# Altium PCB 20230727_DAFABT-验证-FPC-73颗灯板.PcbDoc (part 2 of 2)
Units mm, origin at the board's own origin, x right, y up, seen from the top; angles counter-clockwise.
Board outline 277.23 x 135.59 mm, 2 copper layers (Top Layer, Bottom Layer); 80 components, 3 nets, 172 pads, 0 vias.
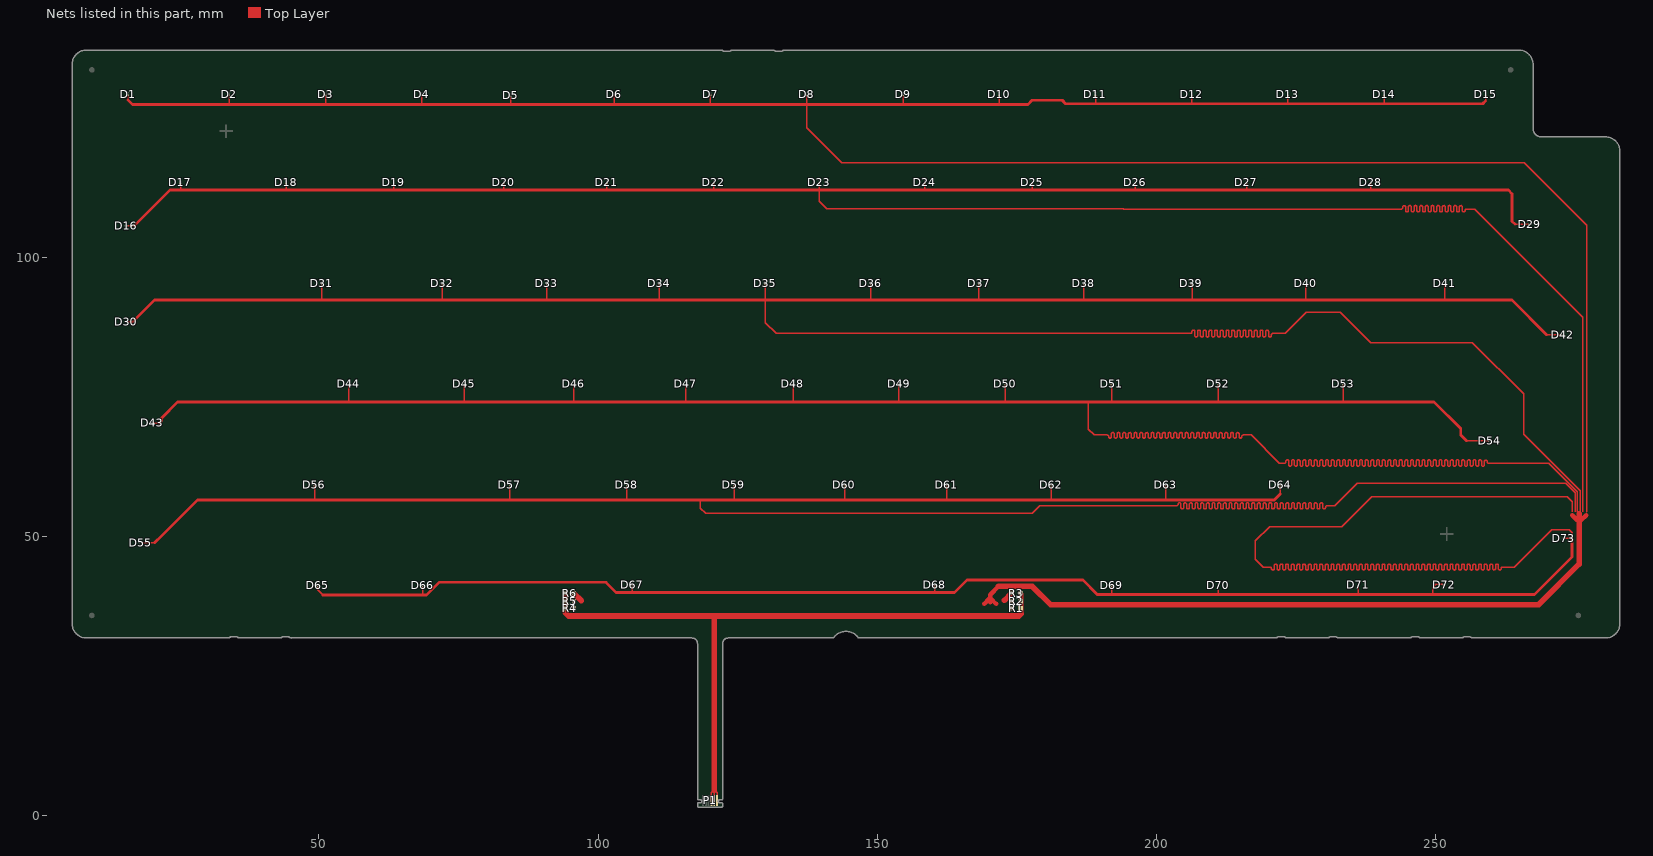
[diagram p2: the nets of this part, all layers, seen from the top]

## Nets (pads, with @x,y where several pads share a name; then routed paths per layer and width w, separated by ;. In a path a pad name is that pad's centre, name@x,y a point inside that pad or via, vN(x,y) a via of type N, cw(c..) or ccw(c..) an arc to the next point about the centre after c; other vN are vias at no path point) (continued)
Net30_1: D1.1 D2.1 D3.1 D4.1 D5.1 D6.1 D7.1 D8.1 D9.1 D10.1 D11.1 D12.1 D13.1 D14.1 D15.1 D16.1 D17.1 D18.1 D19.1 D20.1 D21.1 D22.1 D23.1 D24.1 D25.1 D26.1 D27.1 D28.1 D29.1 D30.1 D31.1 D32.1 D33.1 D34.1 D35.1 D36.1 D37.1 D38.1 D39.1 D40.1 D41.1 D42.1 D43.1 D44.1 D45.1 D46.1 D47.1 D48.1 D49.1 D50.1 D51.1 D52.1 D53.1 D54.1 D55.1 D56.1 D57.1 D58.1 D59.1 D60.1 D61.1 D62.1 D63.1 D64.1 D65.1 D66.1 D67.1 D68.1 D69.1 D70.1 D71.1 D72.1 D73.1 R1.2 R2.2 R3.2 R4.2 R5.2 R6.2 | length 2921.9
  Top Layer w0.254: 15.785,88.407 15.788,88.409 16.654,88.409 ; 15.785,105.631 15.793,105.639 16.993,105.639 ; 15.821,128.171 15.821,128.892 15.824,128.894 ; 18.387,48.842 20.597,48.842 ; 20.522,70.309 20.547,70.284 21.415,70.284 ; 25.219,113.091 25.222,113.088 25.222,112.002 ; 33.922,127.356 33.922,128.796 33.967,128.841 ; 44.143,113.091 44.145,113.089 44.145,112.002 ; 49.216,58.941 49.225,58.932 49.225,56.515 ; 49.765,40.891 49.765,40.43 50.698,39.497 ; 50.517,95.041 50.521,95.037 50.521,92.304 ; 51.204,128.885 51.206,128.882 51.206,127.356 ; 55.332,76.991 55.347,76.976 55.347,74.066 ; 63.389,113.091 63.398,113.082 63.398,112.002 ; 68.44,128.894 68.453,128.882 68.453,127.356 ; 68.58,39.497 68.58,40.868 68.603,40.891 ; 72.085,92.304 72.085,95.041 ; 76.073,74.066 76.073,76.991 ; 83.13,113.091 83.134,113.087 83.134,112.002 ; 84.15,56.515 84.15,58.93 84.161,58.941 ; 84.379,127.356 84.379,128.698 84.39,128.708 ; 90.813,95.041 90.83,95.024 90.83,92.304 ; 95.682,74.066 95.682,76.984 95.689,76.991 ; 101.6,112.002 101.6,113.085 101.606,113.091 ; 102.913,128.885 102.921,128.877 102.921,127.356 ; 105.143,58.941 105.156,58.928 105.156,56.515 ; 106.135,40.984 106.147,40.973 106.147,39.929 ; 110.971,95.041 110.998,95.014 110.998,92.304 ; 115.697,74.066 115.697,76.966 115.722,76.991 ; 118.339,56.515 118.339,55.016 119.253,54.102 177.775,54.102 179.146,55.474 187.452,55.474 203.632,55.474 ccw(c203.632,55.728) 203.886,55.728 203.886,55.753 cw(c204.14,55.753) 204.394,55.753 204.394,55.17 ccw(c204.648,55.17) 204.902,55.17 204.902,55.753 cw(c205.156,55.753) 205.41,55.753 205.41,55.17 ccw(c205.664,55.17) 205.918,55.17 205.918,55.753 cw(c206.172,55.753) 206.426,55.753 206.426,55.17 ccw(c206.68,55.17) 206.934,55.17 206.934,55.753 cw(c207.188,55.753) 207.442,55.753 207.442,55.17 ccw(c207.696,55.17) 207.95,55.17 207.95,55.753 cw(c208.204,55.753) 208.458,55.753 208.458,55.17 ccw(c208.712,55.17) 208.966,55.17 208.966,55.753 cw(c209.22,55.753) 209.474,55.753 209.474,55.17 ccw(c209.728,55.17) 209.982,55.17 209.982,55.753 cw(c210.236,55.753) 210.49,55.753 210.49,55.17 ccw(c210.744,55.17) 210.998,55.17 210.998,55.753 cw(c211.252,55.753) 211.506,55.753 211.506,55.17 ccw(c211.76,55.17) 212.014,55.17 212.014,55.753 cw(c212.268,55.753) 212.522,55.753 212.522,55.17 ccw(c212.776,55.17) 213.03,55.17 213.03,55.753 cw(c213.284,55.753) 213.538,55.753 213.538,55.17 ccw(c213.792,55.17) 214.046,55.17 214.046,55.753 cw(c214.3,55.753) 214.554,55.753 214.554,55.17 ccw(c214.808,55.17) 215.062,55.17 215.062,55.753 cw(c215.316,55.753) 215.57,55.753 215.57,55.17 ccw(c215.824,55.17) 216.078,55.17 216.078,55.753 cw(c216.332,55.753) 216.586,55.753 216.586,55.17 ccw(c216.84,55.17) 217.094,55.17 217.094,55.753 cw(c217.348,55.753) 217.602,55.753 217.602,55.17 ccw(c217.856,55.17) 218.11,55.17 218.11,55.753 cw(c218.364,55.753) 218.618,55.753 218.618,55.17 ccw(c218.872,55.17) 219.126,55.17 219.126,55.753 cw(c219.38,55.753) 219.634,55.753 219.634,55.17 ccw(c219.888,55.17) 220.142,55.17 220.142,55.753 cw(c220.396,55.753) 220.65,55.753 220.65,55.17 ccw(c220.904,55.17) 221.158,55.17 221.158,55.753 cw(c221.412,55.753) 221.666,55.753 221.666,55.17 ccw(c221.92,55.17) 222.174,55.17 222.174,55.753 cw(c222.428,55.753) 222.682,55.753 222.682,55.17 ccw(c222.936,55.17) 223.19,55.17 223.19,55.753 cw(c223.444,55.753) 223.698,55.753 223.698,55.17 ccw(c223.952,55.17) 224.206,55.17 224.206,55.753 cw(c224.46,55.753) 224.714,55.753 224.714,55.17 ccw(c224.968,55.17) 225.222,55.17 225.222,55.753 cw(c225.476,55.753) 225.73,55.753 225.73,55.17 ccw(c225.984,55.17) 226.238,55.17 226.238,55.753 cw(c226.492,55.753) 226.746,55.753 226.746,55.17 ccw(c227,55.17) 227.254,55.17 227.254,55.753 cw(c227.508,55.753) 227.762,55.753 227.762,55.17 ccw(c228.016,55.17) 228.27,55.17 228.27,55.753 cw(c228.524,55.753) 228.778,55.753 228.778,55.17 ccw(c229.032,55.17) 229.286,55.17 229.286,55.753 cw(c229.54,55.753) 229.794,55.753 229.794,55.17 ccw(c230.048,55.17) 230.302,55.17 230.302,55.22 cw(c230.556,55.22) 230.556,55.474 230.683,55.474 231.978,55.474 235.991,59.487 273.304,59.487 274.98,57.81 274.98,54.376 ; 120.142,127.356 120.142,128.877 120.15,128.885 ; 120.727,113.091 120.752,113.067 120.752,112.002 ; 124.331,58.941 124.358,58.914 124.358,56.515 ; 129.917,95.041 129.921,95.037 129.921,92.304 129.946,92.279 129.946,88.265 131.877,86.335 205.992,86.335 206.119,86.335 ccw(c206.119,86.589) 206.373,86.589 206.373,86.683 cw(c206.627,86.683) 206.881,86.683 206.881,85.945 ccw(c207.135,85.945) 207.389,85.945 207.389,86.683 cw(c207.643,86.683) 207.897,86.683 207.897,85.945 ccw(c208.151,85.945) 208.405,85.945 208.405,86.683 cw(c208.659,86.683) 208.913,86.683 208.913,85.945 ccw(c209.167,85.945) 209.421,85.945 209.421,86.683 cw(c209.675,86.683) 209.929,86.683 209.929,85.945 ccw(c210.183,85.945) 210.437,85.945 210.437,86.683 cw(c210.691,86.683) 210.945,86.683 210.945,85.945 ccw(c211.199,85.945) 211.453,85.945 211.453,86.683 cw(c211.707,86.683) 211.961,86.683 211.961,85.945 ccw(c212.215,85.945) 212.469,85.945 212.469,86.683 cw(c212.723,86.683) 212.977,86.683 212.977,85.945 ccw(c213.231,85.945) 213.485,85.945 213.485,86.683 cw(c213.739,86.683) 213.993,86.683 213.993,85.945 ccw(c214.247,85.945) 214.501,85.945 214.501,86.683 cw(c214.755,86.683) 215.009,86.683 215.009,85.945 ccw(c215.263,85.945) 215.517,85.945 215.517,86.683 cw(c215.771,86.683) 216.025,86.683 216.025,85.945 ccw(c216.279,85.945) 216.533,85.945 216.533,86.683 cw(c216.787,86.683) 217.041,86.683 217.041,85.945 ccw(c217.295,85.945) 217.549,85.945 217.549,86.683 cw(c217.803,86.683) 218.057,86.683 218.057,85.945 ccw(c218.311,85.945) 218.565,85.945 218.565,86.683 cw(c218.819,86.683) 219.073,86.683 219.073,85.945 ccw(c219.327,85.945) 219.581,85.945 219.581,86.683 cw(c219.835,86.683) 220.089,86.683 220.089,85.945 ccw(c220.343,85.945) 220.597,85.945 220.597,86.081 cw(c220.851,86.081) 220.851,86.335 223.037,86.335 223.726,87.023 226.873,90.17 232.893,90.17 238.354,84.709 256.616,84.709 265.811,75.514 265.811,68.275 275.895,58.191 275.895,54.392 ; 134.853,76.991 134.925,76.919 134.925,74.066 ; 137.386,128.885 137.389,128.883 137.389,127.356 137.389,123.19 143.688,116.891 265.887,116.891 277.038,105.74 277.038,54.381 277.032,54.376 ; 139.598,112.002 139.598,110.007 140.97,108.636 194.107,108.636 194.132,108.61 228.27,108.61 243.865,108.61 ccw(c243.865,108.864) 244.119,108.864 244.119,108.991 cw(c244.373,108.991) 244.627,108.991 244.627,108.354 ccw(c244.881,108.354) 245.135,108.354 245.135,109.003 cw(c245.389,109.003) 245.643,109.003 245.643,108.354 ccw(c245.897,108.354) 246.151,108.354 246.151,109.003 cw(c246.405,109.003) 246.659,109.003 246.659,108.354 ccw(c246.913,108.354) 247.167,108.354 247.167,109.003 cw(c247.421,109.003) 247.675,109.003 247.675,108.354 ccw(c247.929,108.354) 248.183,108.354 248.183,109.003 cw(c248.437,109.003) 248.691,109.003 248.691,108.354 ccw(c248.945,108.354) 249.199,108.354 249.199,109.003 cw(c249.453,109.003) 249.707,109.003 249.707,108.354 ccw(c249.961,108.354) 250.215,108.354 250.215,109.003 cw(c250.469,109.003) 250.723,109.003 250.723,108.354 ccw(c250.977,108.354) 251.231,108.354 251.231,109.003 cw(c251.485,109.003) 251.739,109.003 251.739,108.354 ccw(c251.993,108.354) 252.247,108.354 252.247,109.003 cw(c252.501,109.003) 252.755,109.003 252.755,108.354 ccw(c253.009,108.354) 253.263,108.354 253.263,109.003 cw(c253.517,109.003) 253.771,109.003 253.771,108.354 ccw(c254.025,108.354) 254.279,108.354 254.279,109.003 cw(c254.533,109.003) 254.787,109.003 254.787,108.354 ccw(c255.041,108.354) 255.295,108.354 255.295,108.356 cw(c255.549,108.356) 255.549,108.61 255.676,108.61 257.048,108.61 276.403,89.256 276.403,54.397 276.398,54.392 ; 139.624,112.002 139.624,113.088 139.628,113.091 ; 144.131,58.941 144.145,58.927 144.145,56.515 ; 148.819,92.304 148.819,95.017 148.843,95.041 ; 153.899,74.066 153.899,76.979 153.911,76.991 ; 154.623,128.894 154.635,128.882 154.635,127.356 ; 158.518,113.091 158.521,113.087 158.521,112.002 ; 160.336,40.984 160.35,40.971 160.35,39.929 ; 162.447,58.941 162.484,58.904 162.484,56.515 ; 168.224,92.304 168.224,95.024 168.241,95.041 ; 170.205,38.176 170.231,38.202 ; 171.856,127.356 171.856,128.892 171.859,128.894 ; 172.923,74.066 172.923,76.98 172.935,76.991 ; 177.775,112.002 177.775,113.088 177.778,113.091 ; 181.178,56.515 181.178,58.941 ; 187.02,92.304 187.02,95.028 187.033,95.041 ; 187.808,74.066 187.808,69.215 188.874,68.148 189.967,68.148 191.186,68.148 cw(c191.186,67.894) 191.44,67.894 191.44,67.852 ccw(c191.694,67.852) 191.948,67.852 191.948,68.349 cw(c192.202,68.349) 192.456,68.349 192.456,67.852 ccw(c192.71,67.852) 192.964,67.852 192.964,68.349 cw(c193.218,68.349) 193.472,68.349 193.472,67.852 ccw(c193.726,67.852) 193.98,67.852 193.98,68.349 cw(c194.234,68.349) 194.488,68.349 194.488,67.852 ccw(c194.742,67.852) 194.996,67.852 194.996,68.349 cw(c195.25,68.349) 195.504,68.349 195.504,67.852 ccw(c195.758,67.852) 196.012,67.852 196.012,68.349 cw(c196.266,68.349) 196.52,68.349 196.52,67.852 ccw(c196.774,67.852) 197.028,67.852 197.028,68.349 cw(c197.282,68.349) 197.536,68.349 197.536,67.852 ccw(c197.79,67.852) 198.044,67.852 198.044,68.349 cw(c198.298,68.349) 198.552,68.349 198.552,67.852 ccw(c198.806,67.852) 199.06,67.852 199.06,68.349 cw(c199.314,68.349) 199.568,68.349 199.568,67.852 ccw(c199.822,67.852) 200.076,67.852 200.076,68.349 cw(c200.33,68.349) 200.584,68.349 200.584,67.852 ccw(c200.838,67.852) 201.092,67.852 201.092,68.349 cw(c201.346,68.349) 201.6,68.349 201.6,67.852 ccw(c201.854,67.852) 202.108,67.852 202.108,68.349 cw(c202.362,68.349) 202.616,68.349 202.616,67.852 ccw(c202.87,67.852) 203.124,67.852 203.124,68.349 cw(c203.378,68.349) 203.632,68.349 203.632,67.852 ccw(c203.886,67.852) 204.14,67.852 204.14,68.349 cw(c204.394,68.349) 204.648,68.349 204.648,67.852 ccw(c204.902,67.852) 205.156,67.852 205.156,68.349 cw(c205.41,68.349) 205.664,68.349 205.664,67.852 ccw(c205.918,67.852) 206.172,67.852 206.172,68.349 cw(c206.426,68.349) 206.68,68.349 206.68,67.852 ccw(c206.934,67.852) 207.188,67.852 207.188,68.349 cw(c207.442,68.349) 207.696,68.349 207.696,67.852 ccw(c207.95,67.852) 208.204,67.852 208.204,68.349 cw(c208.458,68.349) 208.712,68.349 208.712,67.852 ccw(c208.966,67.852) 209.22,67.852 209.22,68.349 cw(c209.474,68.349) 209.728,68.349 209.728,67.852 ccw(c209.982,67.852) 210.236,67.852 210.236,68.349 cw(c210.49,68.349) 210.744,68.349 210.744,67.852 ccw(c210.998,67.852) 211.252,67.852 211.252,68.349 cw(c211.506,68.349) 211.76,68.349 211.76,67.852 ccw(c212.014,67.852) 212.268,67.852 212.268,68.349 cw(c212.522,68.349) 212.776,68.349 212.776,67.852 ccw(c213.03,67.852) 213.284,67.852 213.284,68.349 cw(c213.538,68.349) 213.792,68.349 213.792,67.852 ccw(c214.046,67.852) 214.3,67.852 214.3,68.349 cw(c214.554,68.349) 214.808,68.349 214.808,67.852 ccw(c215.062,67.852) 215.316,67.852 215.316,67.894 cw(c215.57,67.894) 215.57,68.148 215.697,68.148 216.967,68.148 222.047,63.068 222.809,63.068 222.936,63.068 ccw(c222.936,63.322) 223.19,63.322 223.19,63.438 cw(c223.444,63.438) 223.698,63.438 223.698,62.81 ccw(c223.952,62.81) 224.206,62.81 224.206,63.438 cw(c224.46,63.438) 224.714,63.438 224.714,62.81 ccw(c224.968,62.81) 225.222,62.81 225.222,63.438 cw(c225.476,63.438) 225.73,63.438 225.73,62.81 ccw(c225.984,62.81) 226.238,62.81 226.238,63.438 cw(c226.492,63.438) 226.746,63.438 226.746,62.81 ccw(c227,62.81) 227.254,62.81 227.254,63.438 cw(c227.508,63.438) 227.762,63.438 227.762,62.81 ccw(c228.016,62.81) 228.27,62.81 228.27,63.438 cw(c228.524,63.438) 228.778,63.438 228.778,62.81 ccw(c229.032,62.81) 229.286,62.81 229.286,63.438 cw(c229.54,63.438) 229.794,63.438 229.794,62.81 ccw(c230.048,62.81) 230.302,62.81 230.302,63.438 cw(c230.556,63.438) 230.81,63.438 230.81,62.81 ccw(c231.064,62.81) 231.318,62.81 231.318,63.438 cw(c231.572,63.438) 231.826,63.438 231.826,62.81 ccw(c232.08,62.81) 232.334,62.81 232.334,63.438 cw(c232.588,63.438) 232.842,63.438 232.842,62.81 ccw(c233.096,62.81) 233.35,62.81 233.35,63.438 cw(c233.604,63.438) 233.858,63.438 233.858,62.81 ccw(c234.112,62.81) 234.366,62.81 234.366,63.438 cw(c234.62,63.438) 234.874,63.438 234.874,62.81 ccw(c235.128,62.81) 235.382,62.81 235.382,63.438 cw(c235.636,63.438) 235.89,63.438 235.89,62.81 ccw(c236.144,62.81) 236.398,62.81 236.398,63.438 cw(c236.652,63.438) 236.906,63.438 236.906,62.81 ccw(c237.16,62.81) 237.414,62.81 237.414,63.438 cw(c237.668,63.438) 237.922,63.438 237.922,62.81 ccw(c238.176,62.81) 238.43,62.81 238.43,63.438 cw(c238.684,63.438) 238.938,63.438 238.938,62.81 ccw(c239.192,62.81) 239.446,62.81 239.446,63.438 cw(c239.7,63.438) 239.954,63.438 239.954,62.81 ccw(c240.208,62.81) 240.462,62.81 240.462,63.438 cw(c240.716,63.438) 240.97,63.438 240.97,62.81 ccw(c241.224,62.81) 241.478,62.81 241.478,63.438 cw(c241.732,63.438) 241.986,63.438 241.986,62.81 ccw(c242.24,62.81) 242.494,62.81 242.494,63.438 cw(c242.748,63.438) 243.002,63.438 243.002,62.81 ccw(c243.256,62.81) 243.51,62.81 243.51,63.438 cw(c243.764,63.438) 244.018,63.438 244.018,62.81 ccw(c244.272,62.81) 244.526,62.81 244.526,63.438 cw(c244.78,63.438) 245.034,63.438 245.034,62.81 ccw(c245.288,62.81) 245.542,62.81 245.542,63.438 cw(c245.796,63.438) 246.05,63.438 246.05,62.81 ccw(c246.304,62.81) 246.558,62.81 246.558,63.438 cw(c246.812,63.438) 247.066,63.438 247.066,62.81 ccw(c247.32,62.81) 247.574,62.81 247.574,63.438 cw(c247.828,63.438) 248.082,63.438 248.082,62.81 ccw(c248.336,62.81) 248.59,62.81 248.59,63.438 cw(c248.844,63.438) 249.098,63.438 249.098,62.81 ccw(c249.352,62.81) 249.606,62.81 249.606,63.438 cw(c249.86,63.438) 250.114,63.438 250.114,62.81 ccw(c250.368,62.81) 250.622,62.81 250.622,63.438 cw(c250.876,63.438) 251.13,63.438 251.13,62.81 ccw(c251.384,62.81) 251.638,62.81 251.638,63.438 cw(c251.892,63.438) 252.146,63.438 252.146,62.81 ccw(c252.4,62.81) 252.654,62.81 252.654,63.438 cw(c252.908,63.438) 253.162,63.438 253.162,62.81 ccw(c253.416,62.81) 253.67,62.81 253.67,63.438 cw(c253.924,63.438) 254.178,63.438 254.178,62.81 ccw(c254.432,62.81) 254.686,62.81 254.686,63.438 cw(c254.94,63.438) 255.194,63.438 255.194,62.81 ccw(c255.448,62.81) 255.702,62.81 255.702,63.438 cw(c255.956,63.438) 256.21,63.438 256.21,62.81 ccw(c256.464,62.81) 256.718,62.81 256.718,63.438 cw(c256.972,63.438) 257.226,63.438 257.226,62.81 ccw(c257.48,62.81) 257.734,62.81 257.734,63.438 cw(c257.988,63.438) 258.242,63.438 258.242,62.81 ccw(c258.496,62.81) 258.75,62.81 258.75,63.39 cw(c259.004,63.39) 259.258,63.39 259.258,63.322 ccw(c259.512,63.322) 259.512,63.068 265.201,63.068 270.281,63.068 275.361,57.988 275.361,54.376 ; 189.096,128.894 189.103,128.887 189.103,127.457 ; 191.975,76.991 191.999,76.968 191.999,74.066 ; 192.036,40.891 192.049,40.878 192.049,39.599 ; 196.215,112.002 196.215,113.084 196.222,113.091 ; 201.651,58.941 201.676,58.916 201.676,56.515 ; 206.281,95.041 206.4,94.922 206.4,92.304 ; 206.332,128.894 206.35,128.877 206.35,127.457 ; 211.072,76.991 211.125,76.938 211.125,74.066 ; 211.074,39.599 211.074,40.413 211.088,40.428 ; 216.134,113.091 216.154,113.072 216.154,112.002 ; 222.18,57.575 D64.1@222.18,59.072 ; 223.569,128.894 223.571,128.892 223.571,127.457 ; 224.358,127.457 224.384,127.483 ; 226.797,92.304 226.797,95.041 ; 233.435,74.066 233.435,76.991 ; 236.168,40.984 236.169,40.983 236.169,39.599 ; 238.367,112.002 238.367,113.091 ; 240.805,128.885 240.817,128.873 240.817,127.483 ; 249.479,39.599 249.479,40.818 250.063,41.402 251.172,41.402 251.247,41.327 ; 251.637,92.304 251.637,95.041 ; 255.575,67.111 D54.1@259.52,67.111 ; 258.948,127.986 D15.1@258.948,129.008 ; 264.211,105.92 D29.1@266.72,105.92 ; 268.478,37.719 268.478,37.795 ; 269.917,86.09 D42.1@272.607,86.09 ; D73.1@273.156,49.652 274.298,49.652 274.447,49.503 274.447,50.673 273.914,51.206 270.789,51.206 264.084,44.501 262.141,44.501 262.014,44.501 ccw(c262.014,44.247) 261.76,44.247 261.76,44.219 cw(c261.506,44.219) 261.252,44.219 261.252,44.768 ccw(c260.998,44.768) 260.744,44.768 260.744,44.219 cw(c260.49,44.219) 260.236,44.219 260.236,44.768 ccw(c259.982,44.768) 259.728,44.768 259.728,44.219 cw(c259.474,44.219) 259.22,44.219 259.22,44.768 ccw(c258.966,44.768) 258.712,44.768 258.712,44.219 cw(c258.458,44.219) 258.204,44.219 258.204,44.768 ccw(c257.95,44.768) 257.696,44.768 257.696,44.219 cw(c257.442,44.219) 257.188,44.219 257.188,44.768 ccw(c256.934,44.768) 256.68,44.768 256.68,44.219 cw(c256.426,44.219) 256.172,44.219 256.172,44.768 ccw(c255.918,44.768) 255.664,44.768 255.664,44.219 cw(c255.41,44.219) 255.156,44.219 255.156,44.768 ccw(c254.902,44.768) 254.648,44.768 254.648,44.219 cw(c254.394,44.219) 254.14,44.219 254.14,44.768 ccw(c253.886,44.768) 253.632,44.768 253.632,44.219 cw(c253.378,44.219) 253.124,44.219 253.124,44.768 ccw(c252.87,44.768) 252.616,44.768 252.616,44.219 cw(c252.362,44.219) 252.108,44.219 252.108,44.768 ccw(c251.854,44.768) 251.6,44.768 251.6,44.219 cw(c251.346,44.219) 251.092,44.219 251.092,44.768 ccw(c250.838,44.768) 250.584,44.768 250.584,44.219 cw(c250.33,44.219) 250.076,44.219 250.076,44.768 ccw(c249.822,44.768) 249.568,44.768 249.568,44.219 cw(c249.314,44.219) 249.06,44.219 249.06,44.768 ccw(c248.806,44.768) 248.552,44.768 248.552,44.219 cw(c248.298,44.219) 248.044,44.219 248.044,44.768 ccw(c247.79,44.768) 247.536,44.768 247.536,44.219 cw(c247.282,44.219) 247.028,44.219 247.028,44.768 ccw(c246.774,44.768) 246.52,44.768 246.52,44.219 cw(c246.266,44.219) 246.012,44.219 246.012,44.768 ccw(c245.758,44.768) 245.504,44.768 245.504,44.219 cw(c245.25,44.219) 244.996,44.219 244.996,44.768 ccw(c244.742,44.768) 244.488,44.768 244.488,44.219 cw(c244.234,44.219) 243.98,44.219 243.98,44.768 ccw(c243.726,44.768) 243.472,44.768 243.472,44.219 cw(c243.218,44.219) 242.964,44.219 242.964,44.768 ccw(c242.71,44.768) 242.456,44.768 242.456,44.219 cw(c242.202,44.219) 241.948,44.219 241.948,44.768 ccw(c241.694,44.768) 241.44,44.768 241.44,44.219 cw(c241.186,44.219) 240.932,44.219 240.932,44.768 ccw(c240.678,44.768) 240.424,44.768 240.424,44.219 cw(c240.17,44.219) 239.916,44.219 239.916,44.768 ccw(c239.662,44.768) 239.408,44.768 239.408,44.219 cw(c239.154,44.219) 238.9,44.219 238.9,44.768 ccw(c238.646,44.768) 238.392,44.768 238.392,44.219 cw(c238.138,44.219) 237.884,44.219 237.884,44.768 ccw(c237.63,44.768) 237.376,44.768 237.376,44.219 cw(c237.122,44.219) 236.868,44.219 236.868,44.768 ccw(c236.614,44.768) 236.36,44.768 236.36,44.219 cw(c236.106,44.219) 235.852,44.219 235.852,44.768 ccw(c235.598,44.768) 235.344,44.768 235.344,44.219 cw(c235.09,44.219) 234.836,44.219 234.836,44.768 ccw(c234.582,44.768) 234.328,44.768 234.328,44.219 cw(c234.074,44.219) 233.82,44.219 233.82,44.768 ccw(c233.566,44.768) 233.312,44.768 233.312,44.219 cw(c233.058,44.219) 232.804,44.219 232.804,44.768 ccw(c232.55,44.768) 232.296,44.768 232.296,44.219 cw(c232.042,44.219) 231.788,44.219 231.788,44.768 ccw(c231.534,44.768) 231.28,44.768 231.28,44.219 cw(c231.026,44.219) 230.772,44.219 230.772,44.768 ccw(c230.518,44.768) 230.264,44.768 230.264,44.219 cw(c230.01,44.219) 229.756,44.219 229.756,44.768 ccw(c229.502,44.768) 229.248,44.768 229.248,44.219 cw(c228.994,44.219) 228.74,44.219 228.74,44.768 ccw(c228.486,44.768) 228.232,44.768 228.232,44.219 cw(c227.978,44.219) 227.724,44.219 227.724,44.768 ccw(c227.47,44.768) 227.216,44.768 227.216,44.219 cw(c226.962,44.219) 226.708,44.219 226.708,44.768 ccw(c226.454,44.768) 226.2,44.768 226.2,44.219 cw(c225.946,44.219) 225.692,44.219 225.692,44.768 ccw(c225.438,44.768) 225.184,44.768 225.184,44.219 cw(c224.93,44.219) 224.676,44.219 224.676,44.768 ccw(c224.422,44.768) 224.168,44.768 224.168,44.219 cw(c223.914,44.219) 223.66,44.219 223.66,44.768 ccw(c223.406,44.768) 223.152,44.768 223.152,44.219 cw(c222.898,44.219) 222.644,44.219 222.644,44.768 ccw(c222.39,44.768) 222.136,44.768 222.136,44.219 cw(c221.882,44.219) 221.628,44.219 221.628,44.768 ccw(c221.374,44.768) 221.12,44.768 221.12,44.219 cw(c220.866,44.219) 220.612,44.219 220.612,44.247 ccw(c220.358,44.247) 220.358,44.501 219.583,44.501 219.151,44.501 217.729,45.923 217.729,49.2 220.269,51.74 233.197,51.74 238.541,57.084 273.624,57.084 274.498,56.21 274.498,54.376
  Top Layer w0.5: 15.821,128.171 16.637,127.356 33.922,127.356 51.206,127.356 68.453,127.356 84.379,127.356 102.921,127.356 120.142,127.356 137.389,127.356 154.635,127.356 171.856,127.356 177.013,127.356 177.749,128.092 183.134,128.092 183.769,127.457 189.103,127.457 206.35,127.457 223.571,127.457 224.358,127.457 ; 16.654,88.409 20.549,92.304 50.521,92.304 72.085,92.304 90.83,92.304 110.998,92.304 129.921,92.304 148.819,92.304 168.224,92.304 187.02,92.304 206.4,92.304 226.797,92.304 251.637,92.304 263.702,92.304 269.917,86.09 ; 16.993,105.639 23.356,112.002 25.222,112.002 44.145,112.002 63.398,112.002 83.134,112.002 101.6,112.002 120.752,112.002 139.598,112.002 139.624,112.002 158.521,112.002 177.775,112.002 196.215,112.002 216.154,112.002 238.367,112.002 263.055,112.002 263.715,111.341 263.715,106.415 264.211,105.92 ; 20.597,48.842 21.793,50.038 28.27,56.515 49.225,56.515 84.15,56.515 105.156,56.515 118.339,56.515 124.358,56.515 144.145,56.515 162.484,56.515 181.178,56.515 201.676,56.515 221.12,56.515 222.18,57.575 ; 21.415,70.284 21.793,70.663 21.793,71.145 24.714,74.066 55.347,74.066 76.073,74.066 95.682,74.066 115.697,74.066 134.925,74.066 153.899,74.066 172.923,74.066 187.808,74.066 191.999,74.066 211.125,74.066 233.435,74.066 249.733,74.066 254.508,69.291 254.508,68.178 255.575,67.111 ; 50.698,39.497 68.58,39.497 69.291,39.497 71.552,41.758 101.422,41.758 103.251,39.929 106.147,39.929 160.35,39.929 163.83,39.929 166.065,42.164 186.842,42.164 189.408,39.599 192.049,39.599 211.074,39.599 236.169,39.599 249.479,39.599 267.716,39.599 274.447,46.33 274.447,49.503 ; 224.384,127.483 240.817,127.483 258.445,127.483 258.948,127.986
  Top Layer w0.8: 169.16,37.893 170.091,38.824 ; 170.231,38.202 170.231,39.548 171.729,41.046 ; 170.354,38.815 171.285,37.884 ; 274.469,53.776 275.399,52.845 ; 276.043,52.854 276.974,53.785
  Top Layer w1: R6.2@95.733,39.751 97.003,38.481 ; 171.729,41.046 177.775,41.046 181.102,37.719 268.478,37.719 ; 172.771,38.532 R3.2@174.041,39.802 ; 268.478,37.795 275.717,45.034 275.717,54.051
VCC: P1.4 P1.5 P1.6 R1.1 R2.1 R3.1 R4.1 R5.1 R6.1 | length 126.4
  Top Layer w0.254: P1.4@120.316,2.7 120.316,4.035 120.816,4.535 ; P1.5@120.816,2.7 120.816,4.535 ; 120.828,4.547 120.816,4.535 ; P1.6@121.316,2.7 121.316,4.035 120.816,4.535 ; R3.1@175.722,39.823 R3.1@175.793,39.752
  Top Layer w0.8: 94.099,36.482 R4.1@94.099,37.11 R5.1@94.099,38.37 R6.1@94.099,39.823 ; 175.793,36.17 175.793,37.11 175.793,38.37 R3.1@175.793,39.752
  Top Layer w1: 94.099,36.482 94.099,36.4 94.761,35.738 120.828,35.738 ; 120.828,4.547 120.828,35.738 ; 175.793,36.17 175.362,35.738 120.828,35.738
pads on no net: P1.3
copper on no net: | length 13.4
  Top Layer w0.254: 114.712,32.365 116.712,32.365 ; 116.744,32.365 cw(c116.744,30.76) 118.339,30.575 118.339,28.575 ; 121.762,28.758 121.762,30.758 ; 121.762,30.79 cw(c123.368,30.79) 123.552,32.385 125.552,32.385

## Other copper
Top Layer:
  rectangle net Net30_1: 95.225,36.643 174.633,38.786
  rectangle net Net30_1: 173.685,36.643 174.633,40.259
  rectangle net Net30_1: 95.225,36.643 96.172,40.259
  rectangle net Net30_1: 274.015,53.492 277.546,54.839
  rectangle net GND: 86.258,36.17 87.782,38.938

## Silkscreen, mask and mechanical layers (free items; w line width, h text height)
Mechanical 1:
  circle w0.001: c39.636,85.628 r1
  circle w0.001: c115.836,85.628 r1
  circle w0.001: c230.136,85.625 r2.1
  circle w0.001: c225.374,103.676 r2.1
  circle w0.001: c187.274,103.676 r2.1
  circle w0.001: c180.477,123.355 r2.1
  circle w0.001: c239.661,50.34 r2.1
  circle w0.001: c182.511,50.34 r2.1
  circle w0.001: c182.511,67.575 r2.1
  circle w0.001: c63.449,121.725 r1.45
  circle w0.001: c25.349,105.305 r2.1
  circle w0.001: c87.261,50.34 r2.1
  circle w0.001: c125.361,67.575 r2.1
  circle w0.001: c39.636,68.391 r1.15
  circle w0.001: c49.161,50.34 r2.1
  circle w0.001: c263.474,49.525 r1.45
  lines w0.001: 5.799,34.391 ccw(c8.399,34.391) 8.399,31.791 33.785,31.791 ccw(c33.785,32.091) 33.983,31.865 cw(c34.314,31.491) 34.314,31.99 35.214,31.99 cw(c35.214,31.491) 35.545,31.865 ccw(c35.743,32.091) 35.743,31.791 41.214,31.791 43.085,31.791 ccw(c43.085,32.09) 43.283,31.865 cw(c43.614,31.49) 43.614,31.99 44.514,31.99 cw(c44.514,31.49) 44.845,31.865 ccw(c45.029,32.054) 45.043,31.791 116.816,31.791 cw(c116.816,30.79) 117.816,30.79 117.816,3 ccw(c118.016,3) 118.016,2.8 118.366,2.8 cw(c118.366,2.601) 118.566,2.601 118.566,2.5 cw(c118.366,2.5) 118.366,2.3 118.016,2.3 ccw(c118.016,2.1) 117.816,2.1 117.816,1.7 ccw(c118.016,1.7) 118.016,1.5 122.116,1.5 ccw(c122.116,1.7) 122.316,1.7 122.316,2.1 ccw(c122.116,2.1) 122.116,2.3 121.766,2.3 cw(c121.766,2.5) 121.566,2.5 121.566,2.601 cw(c121.766,2.601) 121.766,2.8 122.116,2.8 ccw(c122.116,3) 122.316,3 122.316,30.79 cw(c123.316,30.79) 123.316,31.791 142.006,31.791 ccw(c142.006,32.09) 142.246,31.911 cw(c144.406,30.29) 146.566,31.91 ccw(c146.806,32.09) 146.806,31.791 221.385,31.791 ccw(c221.385,32.091) 221.583,31.865 cw(c221.914,31.491) 221.914,31.99 222.814,31.99 cw(c222.814,31.49) 223.145,31.865 ccw(c223.343,32.091) 223.343,31.791 228.814,31.791 230.685,31.791 ccw(c230.685,32.091) 230.883,31.865 cw(c231.214,31.491) 231.214,31.99 232.114,31.99 cw(c232.114,31.491) 232.445,31.865 ccw(c232.643,32.091) 232.643,31.791 245.385,31.791 ccw(c245.385,32.091) 245.583,31.865 cw(c245.914,31.491) 245.914,31.99 246.814,31.99 cw(c246.814,31.491) 247.145,31.865 ccw(c247.347,32.102) 247.343,31.791 252.814,31.791 254.685,31.791 ccw(c254.685,32.091) 254.883,31.865 cw(c255.214,31.491) 255.214,31.99 256.114,31.99 cw(c256.114,31.491) 256.445,31.865 ccw(c256.643,32.091) 256.643,31.791 280.424,31.791 ccw(c280.424,34.391) 283.024,34.391 283.024,118.94 ccw(c280.424,118.94) 280.424,121.54 268.973,121.54 cw(c268.973,123.04) 267.473,123.04 267.473,134.49 ccw(c264.873,134.49) 264.873,137.09 133.323,137.09 ccw(c133.323,136.79) 133.125,137.015 cw(c132.794,137.39) 132.794,136.89 131.894,136.89 cw(c131.894,137.39) 131.563,137.015 ccw(c131.365,136.79) 131.365,137.09 129.494,137.09 124.023,137.09 ccw(c124.023,136.791) 123.825,137.015 cw(c123.494,137.391) 123.494,136.89 122.594,136.89 cw(c122.594,137.391) 122.263,137.015 ccw(c122.065,136.791) 122.065,137.09 8.399,137.09 ccw(c8.399,134.49) 5.799,134.49 5.799,34.391 ; 239.361,67.24 cw(c239.361,68.39) 239.361,69.54 239.961,69.54 cw(c239.961,68.39) 239.961,67.24 239.361,67.24 ; 248.435,67.391 cw(c248.435,68.391) 248.435,69.391 249.835,69.391 cw(c249.835,68.391) 249.835,67.391 248.435,67.391
Mechanical 2:
  circle w0.001: c39.636,85.628 r3
  circle w0.001: c39.636,85.628 r3
  circle w0.001: c39.636,85.628 r3
  circle w0.001: c39.636,85.628 r3
  circle w0.001: c115.836,85.628 r3
  circle w0.001: c115.836,85.628 r3
  circle w0.001: c115.836,85.628 r3
  circle w0.001: c263.474,49.525 r3.45
  circle w0.001: c239.661,50.34 r4.1
  circle w0.001: c230.136,85.625 r4.1
  circle w0.001: c225.374,103.676 r4.1
  circle w0.001: c187.274,103.676 r4.1
  circle w0.001: c182.511,50.34 r4.1
  circle w0.001: c182.511,67.575 r4.1
  circle w0.001: c87.261,50.34 r4.1
  circle w0.001: c125.361,67.575 r4.1
  circle w0.001: c115.836,85.628 r3
  circle w0.001: c49.161,50.34 r4.1
  circle w0.001: c39.636,68.391 r3.15
  circle w0.001: c25.349,105.305 r4.1
  circle w0.001: c180.477,123.355 r4.1
  circle w0.001: c63.449,121.725 r3.45
  lines w0.001: 239.361,65.24 cw(c239.361,68.39) 239.361,71.54 239.961,71.54 cw(c239.961,68.39) 239.961,65.24 239.361,65.24 ; 248.435,65.391 cw(c248.435,68.391) 248.435,71.391 249.835,71.391 cw(c249.835,68.391) 249.835,65.391 248.435,65.391
Mechanical 3:
  drawing of 542 lines, arcs and shapes, not listed

## Text inside footprints (layer, text, board x,y; h text height)
D1: Top Overlay "+" at 15.621,128.096 h1; Top Overlay "-" at 15.697,129.76 h1
D2: Top Overlay "+" at 33.764,128.043 h1; Top Overlay "-" at 33.84,129.706 h1
D3: Top Overlay "+" at 51,128.086 h1; Top Overlay "-" at 51.077,129.75 h1
D4: Top Overlay "+" at 68.237,128.096 h1; Top Overlay "-" at 68.313,129.76 h1
D5: Top Overlay "+" at 84.186,127.91 h1; Top Overlay "-" at 84.263,129.574 h1
D6: Top Overlay "+" at 102.71,128.086 h1; Top Overlay "-" at 102.786,129.75 h1
D7: Top Overlay "+" at 119.946,128.086 h1; Top Overlay "-" at 120.023,129.75 h1
D8: Top Overlay "+" at 137.183,128.086 h1; Top Overlay "-" at 137.259,129.75 h1
D9: Top Overlay "+" at 154.419,128.096 h1; Top Overlay "-" at 154.496,129.76 h1
D10: Top Overlay "+" at 171.656,128.096 h1; Top Overlay "-" at 171.732,129.76 h1
D11: Top Overlay "+" at 188.892,128.096 h1; Top Overlay "-" at 188.969,129.76 h1
D12: Top Overlay "+" at 206.129,128.096 h1; Top Overlay "-" at 206.205,129.76 h1
D13: Top Overlay "+" at 223.365,128.096 h1; Top Overlay "-" at 223.442,129.76 h1
D14: Top Overlay "+" at 240.602,128.086 h1; Top Overlay "-" at 240.678,129.75 h1
D15: Top Overlay "+" at 258.745,128.078 h1; Top Overlay "-" at 258.821,129.742 h1
D16: Top Overlay "-" at 14.92,105.504 h1 r90; Top Overlay "+" at 16.583,105.427 h1 r90
D17: Top Overlay "+" at 25.016,112.293 h1; Top Overlay "-" at 25.092,113.956 h1
D18: Top Overlay "+" at 43.94,112.293 h1; Top Overlay "-" at 44.016,113.956 h1
D19: Top Overlay "+" at 63.186,112.293 h1; Top Overlay "-" at 63.262,113.956 h1
D20: Top Overlay "+" at 82.927,112.293 h1; Top Overlay "-" at 83.003,113.956 h1
D21: Top Overlay "+" at 101.403,112.293 h1; Top Overlay "-" at 101.479,113.956 h1
D22: Top Overlay "+" at 120.524,112.293 h1; Top Overlay "-" at 120.6,113.956 h1
D23: Top Overlay "+" at 139.424,112.293 h1; Top Overlay "-" at 139.501,113.956 h1
D24: Top Overlay "+" at 158.314,112.293 h1; Top Overlay "-" at 158.391,113.956 h1
D25: Top Overlay "+" at 177.574,112.293 h1; Top Overlay "-" at 177.651,113.956 h1
D26: Top Overlay "+" at 196.019,112.293 h1; Top Overlay "-" at 196.095,113.956 h1
D27: Top Overlay "+" at 215.931,112.293 h1; Top Overlay "-" at 216.007,113.956 h1
D28: Top Overlay "+" at 238.164,112.293 h1; Top Overlay "-" at 238.24,113.956 h1
D29: Top Overlay "-" at 267.455,106.047 h1 r270; Top Overlay "+" at 265.791,106.123 h1 r270
D30: Top Overlay "-" at 14.92,88.28 h1 r90; Top Overlay "+" at 16.583,88.203 h1 r90
D31: Top Overlay "+" at 50.313,94.243 h1; Top Overlay "-" at 50.39,95.906 h1
D32: Top Overlay "+" at 71.882,94.243 h1; Top Overlay "-" at 71.958,95.906 h1
D33: Top Overlay "+" at 90.61,94.243 h1; Top Overlay "-" at 90.686,95.906 h1
D34: Top Overlay "+" at 110.767,94.243 h1; Top Overlay "-" at 110.844,95.906 h1
D35: Top Overlay "+" at 129.714,94.243 h1; Top Overlay "-" at 129.79,95.906 h1
D36: Top Overlay "+" at 148.64,94.243 h1; Top Overlay "-" at 148.716,95.906 h1
D37: Top Overlay "+" at 168.038,94.243 h1; Top Overlay "-" at 168.114,95.906 h1
D38: Top Overlay "+" at 186.83,94.243 h1; Top Overlay "-" at 186.906,95.906 h1
D39: Top Overlay "+" at 206.078,94.243 h1; Top Overlay "-" at 206.154,95.906 h1
D40: Top Overlay "+" at 226.593,94.243 h1; Top Overlay "-" at 226.67,95.906 h1
D41: Top Overlay "+" at 251.434,94.243 h1; Top Overlay "-" at 251.51,95.906 h1
D42: Top Overlay "-" at 273.341,86.217 h1 r270; Top Overlay "+" at 271.678,86.293 h1 r270
D43: Top Overlay "-" at 19.657,70.182 h1 r90; Top Overlay "+" at 21.321,70.106 h1 r90
D44: Top Overlay "+" at 55.129,76.193 h1; Top Overlay "-" at 55.205,77.856 h1
D45: Top Overlay "+" at 75.869,76.193 h1; Top Overlay "-" at 75.945,77.856 h1
D46: Top Overlay "+" at 95.485,76.193 h1; Top Overlay "-" at 95.562,77.856 h1
D47: Top Overlay "+" at 115.519,76.193 h1; Top Overlay "-" at 115.595,77.856 h1
D48: Top Overlay "+" at 134.65,76.193 h1; Top Overlay "-" at 134.726,77.856 h1
D49: Top Overlay "+" at 153.708,76.193 h1; Top Overlay "-" at 153.784,77.856 h1
D50: Top Overlay "+" at 172.731,76.193 h1; Top Overlay "-" at 172.808,77.856 h1
D51: Top Overlay "+" at 191.772,76.193 h1; Top Overlay "-" at 191.848,77.856 h1
D52: Top Overlay "+" at 210.868,76.193 h1; Top Overlay "-" at 210.945,77.856 h1
D53: Top Overlay "+" at 233.232,76.193 h1; Top Overlay "-" at 233.308,77.856 h1
D54: Top Overlay "-" at 260.254,67.238 h1 r270; Top Overlay "+" at 258.59,67.315 h1 r270
D55: Top Overlay "-" at 17.522,48.715 h1 r90; Top Overlay "+" at 19.186,48.638 h1 r90
D56: Top Overlay "+" at 49.013,58.143 h1; Top Overlay "-" at 49.089,59.806 h1
D57: Top Overlay "+" at 83.958,58.143 h1; Top Overlay "-" at 84.034,59.806 h1
D58: Top Overlay "+" at 104.94,58.143 h1; Top Overlay "-" at 105.016,59.806 h1
D59: Top Overlay "+" at 124.128,58.143 h1; Top Overlay "-" at 124.204,59.806 h1
D60: Top Overlay "+" at 143.928,58.143 h1; Top Overlay "-" at 144.004,59.806 h1
D61: Top Overlay "+" at 162.243,58.143 h1; Top Overlay "-" at 162.32,59.806 h1
D62: Top Overlay "+" at 180.975,58.143 h1; Top Overlay "-" at 181.051,59.806 h1
D63: Top Overlay "+" at 201.448,58.143 h1; Top Overlay "-" at 201.524,59.806 h1
D64: Top Overlay "+" at 221.977,58.143 h1; Top Overlay "-" at 222.053,59.806 h1
D65: Top Overlay "+" at 49.562,40.093 h1; Top Overlay "-" at 49.638,41.756 h1
D66: Top Overlay "+" at 68.4,40.093 h1; Top Overlay "-" at 68.476,41.756 h1
D67: Top Overlay "+" at 105.932,40.186 h1; Top Overlay "-" at 106.008,41.85 h1
D68: Top Overlay "+" at 160.133,40.186 h1; Top Overlay "-" at 160.209,41.85 h1
D69: Top Overlay "+" at 191.833,40.093 h1; Top Overlay "-" at 191.909,41.756 h1
D70: Top Overlay "+" at 210.883,40.093 h1; Top Overlay "-" at 210.959,41.756 h1
D71: Top Overlay "+" at 235.965,40.186 h1; Top Overlay "-" at 236.041,41.85 h1
D72: Top Overlay "+" at 250.448,41.53 h1 r270; Top Overlay "-" at 252.112,41.454 h1 r270
D73: Top Overlay "+" at 274.086,49.449 h1 r90; Top Overlay "-" at 272.422,49.525 h1 r90